# Altium PCB PCB1_DualModeCar.PcbDoc
Units mil, origin at the board's own origin, x right, y up, seen from the top; angles counter-clockwise.
Board outline 1775.03 x 3545.03 mil, 2 copper layers (Top Layer, Bottom Layer); 14 components, 14 nets, 67 pads, 43 vias.
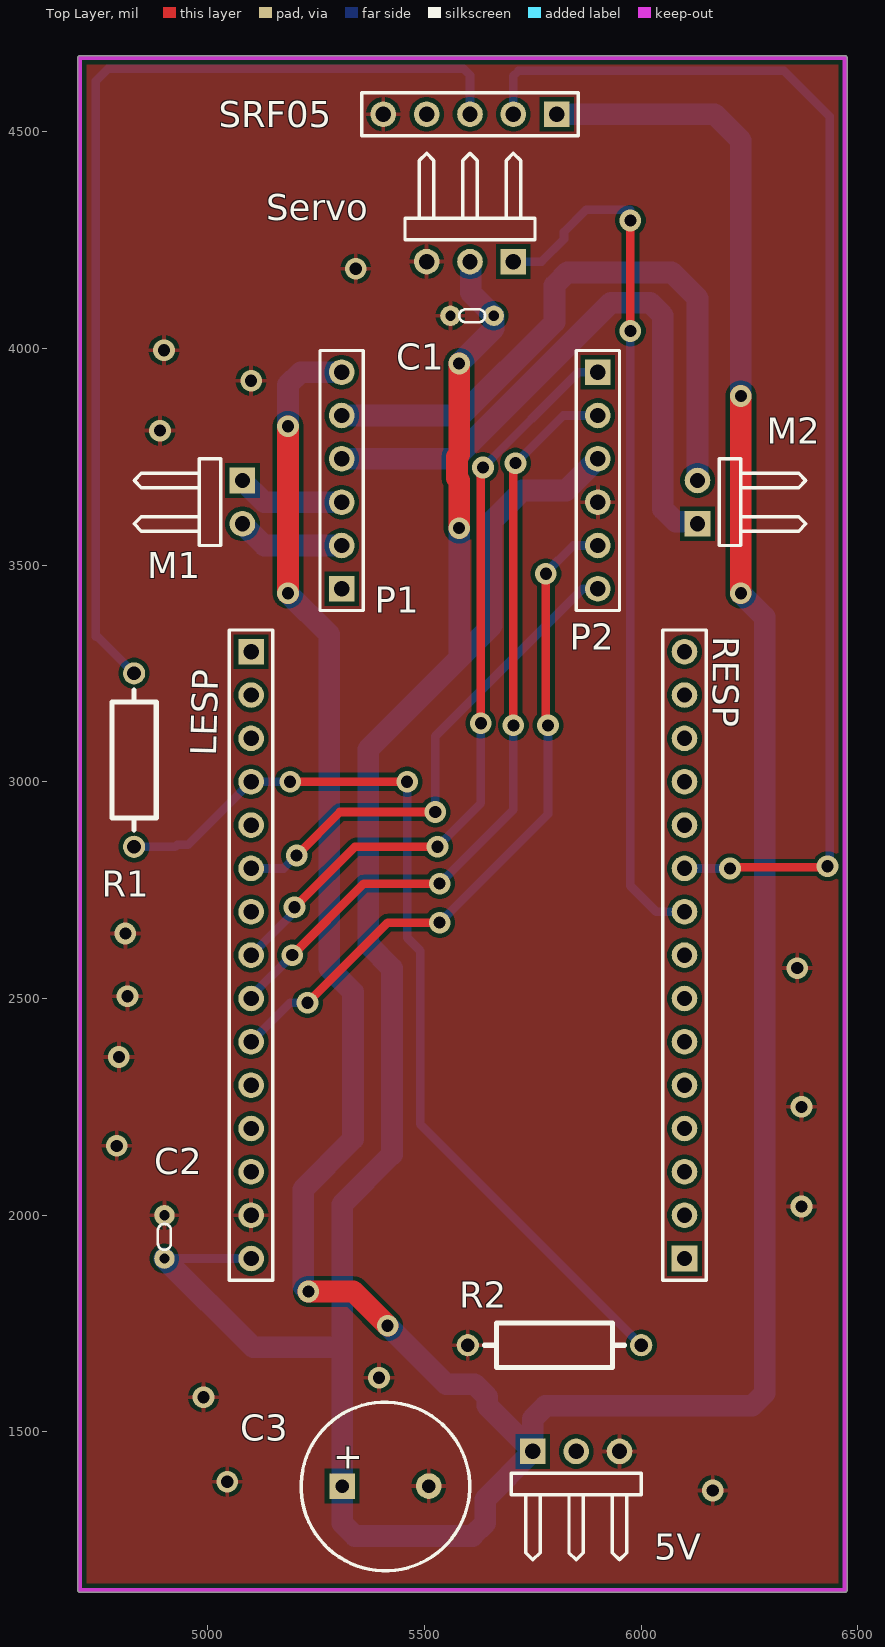
[diagram p0: Top Layer view]
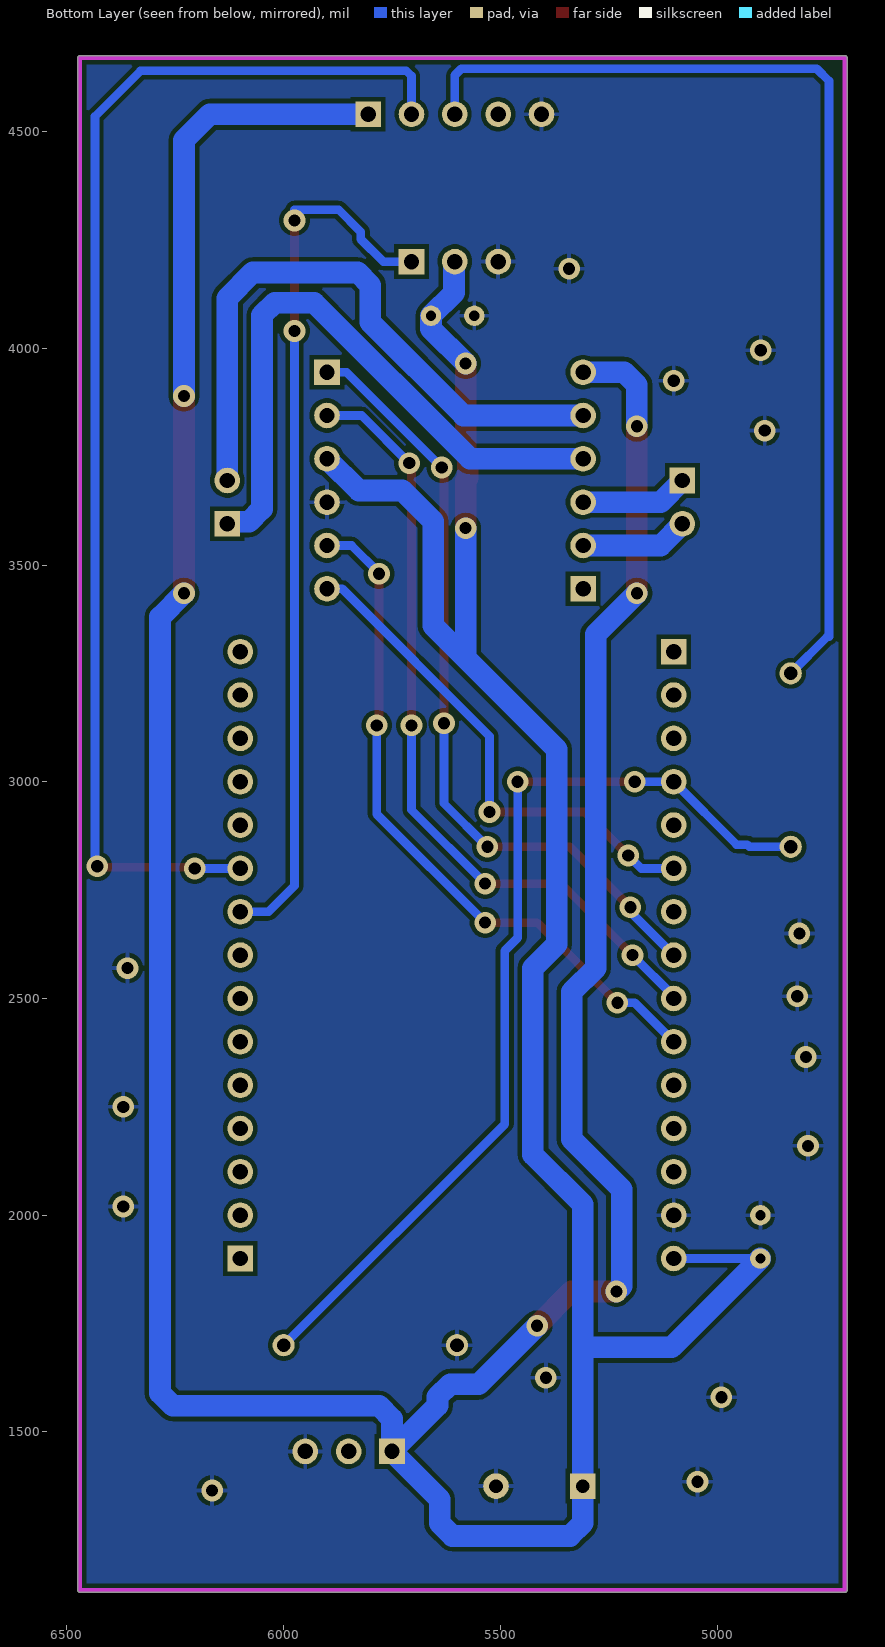
[diagram p1: Bottom Layer view, seen from below]
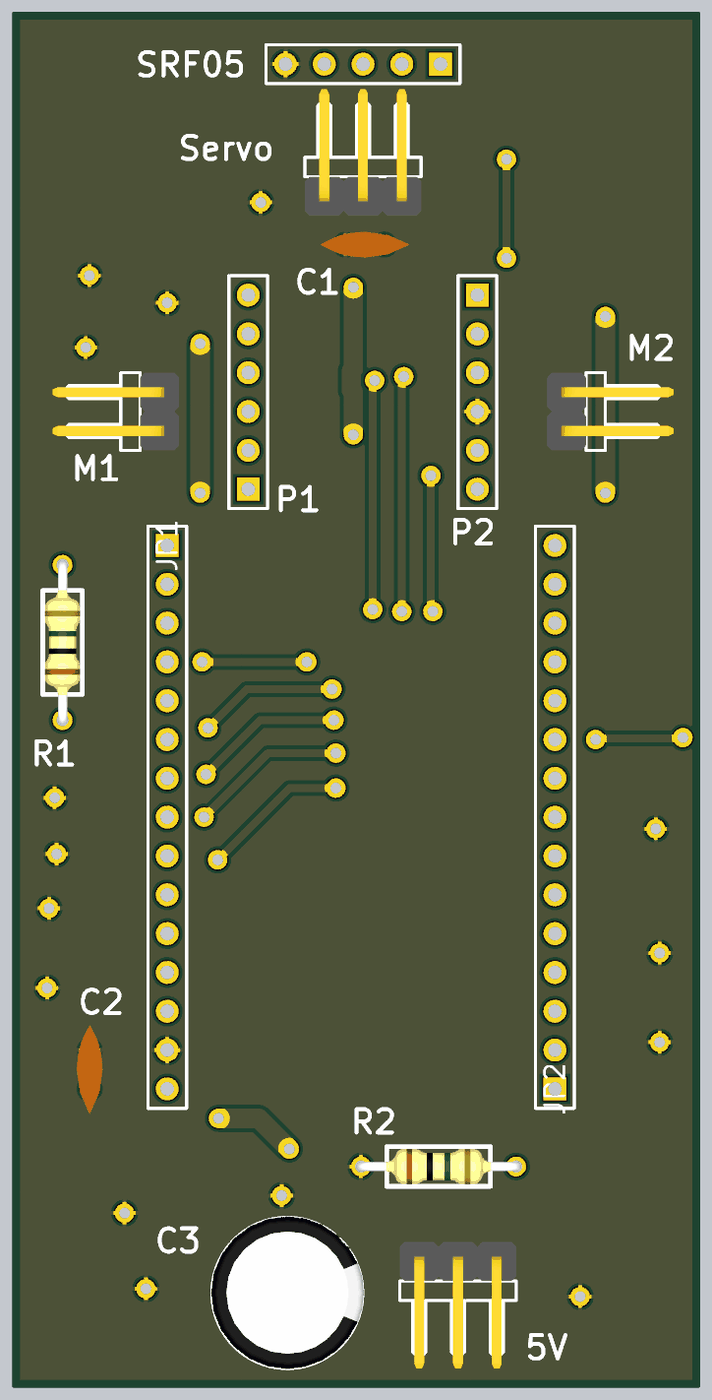
[diagram p2: 3D render of the assembled board from above, using the file's embedded part models]

## Layer stack, top to bottom
Top Solder: solder mask 0.4, Solder Resist, Dk 3.5
Top Layer: signal copper 1.4
Dielectric 1: dielectric 12.6, FR-4, Dk 4.8
Bottom Layer: signal copper 1.4
Bottom Solder: solder mask 0.4, Solder Resist, Dk 3.5

## Board outline
4699.98,1135 ccw(c4705,1135) 4705,1129.98 6470,1129.98 ccw(c6470,1135) 6475.02,1135 6475.02,4670 ccw(c6470,4670) 6470,4675.02 4705,4675.02 ccw(c4705,4670) 4699.98,4670

## Design rules (kind name [scope] priority, off if disabled: settings)
Clearance [All] p1: gap=10 ignorepadtopadclearanceinfootprint=FALSE
PolygonConnect [All] p1: connectstyle=Relief reliefconductorwidth=10 reliefentries=4 polygonreliefangle="90 Angle" airgapwidth=10
RoutingVias [All] p1: holewidth=28 width=50 viastyle="Through Hole" minholewidth=28 minwidth=50 maxholewidth=28 maxwidth=50
SolderMaskExpansion [All] p1: expansion=4 istentingtop=FALSE
Width [All] p1: maxlimit=50 minlimit=15 preferedwidth=20
30 further rules are at their usual default settings.

## Components (designator, comment, footprint, x,y, rotation, side; value= is the part's Value field where it differs from the comment)
5V "Header 3H" HDR1X3H 5750,1455 r0 top locked (schematic designator P7)
C1 "Capacitor Ceramic" Tu-pico 5660,4075 r180 top value=33p
C2 "Capacitor Ceramic" Tu-pico 4900,1900 r90 top locked value=33p
C3 "Cap Pol 8mm" C10mm 5410,1375 r0 top locked
LESP "Header 15" HDR1X15 5100,3300 r270 top locked (schematic designator JP1)
M1 "Header 2H" HDR1X2H 5080,3695 r270 top locked (schematic designator P5)
M2 "Header 2H" HDR1X2H 6130,3595 r90 top locked (schematic designator P6)
P1 "Header 6" HDR1X6 5309,3445 r90 top locked
P2 "Header 6" HDR1X6 5900,3945 r270 top locked
R1 "1k" "RES 1/4W CFR25" 4830,2850 r90 top value="R1/4W - 1K"
R2 "1k" "RES 1/4W CFR25" 5600,1700 r0 top locked value="R1/4W - 2K"
RESP "Header 15" HDR1X15 6100,1900 r90 top locked (schematic designator JP2)
Servo "Header 5" HDR1X5 5805,4540 r180 top (schematic designator P3)
SRF05 "Header 3H" HDR1X3H 5705,4200 r180 top (schematic designator P4)

## Footprints (in the part's own frame and the unit in brackets; to place one, negate y for a bottom-side part, rotate by r counter-clockwise, add the part's x,y. Pads: shape width x height; smd on the part's side, far side on the other; paste and mask are expansions set on the pad)
C10mm [mm]
  rect 1.5x1.5 hole 0.8: 1(-2.54,0)
  round 1.5 hole 0.8: 2(2.54,0)
  silkscreen extent -4.95,-4.96 4.93,4.92, body extent -5,-5 4.97,5, height 20.01
HDR1X2H [mm] "Connector; Header; 2 Position; Right Angle"
  rect 1.5x1.5 hole 0.9: 1(0,0)
  round 1.5 hole 0.9: 2(2.54,0)
  silkscreen extent -1.27,-6.35 3.81,-1.27, body extent -1.27,-7 3.81,1.27, height 4.33
HDR1X3H [mm] "Connector; Header; 3 Position; Right Angle"
  rect 1.5x1.5 hole 0.9: 1(0,0)
  round 1.5 hole 0.9: 2(2.54,0) 3(5.08,0)
  silkscreen extent -1.27,-6.35 6.35,-1.27, body extent -1.27,-7 6.35,1.27, height 4.33
HDR1X5 [mm] "Connector; Header; 5 Position"
  rect 1.5x1.5 hole 0.9: 1(0,0)
  round 1.5 hole 0.9: 2(2.54,0) 3(5.08,0) 4(7.62,0) 5(10.16,0)
  silkscreen extent -1.27,-1.27 11.43,1.27, body extent -1.27,-1.27 11.43,1.27, height 7
HDR1X6 [mm] "Connector; Header; 6 Position"
  rect 1.5x1.5 hole 0.9: 1(0,0)
  round 1.5 hole 0.9: 2(2.54,0) 3(5.08,0) 4(7.62,0) 5(10.16,0) 6(12.7,0)
  silkscreen extent -1.27,-1.27 13.97,1.27, body extent -1.27,-1.27 13.97,1.27, height 7
HDR1X15 [mm] "Connector; Header; 15 Position"
  rect 1.5x1.5 hole 0.9: 1(0,0)
  round 1.5 hole 0.9: 2(2.54,0) 3(5.08,0) 4(7.62,0) 5(10.16,0) 6(12.7,0) 7(15.24,0) 8(17.78,0) 9(20.32,0) 10(22.86,0) 11(25.4,0) 12(27.94,0) 13(30.48,0) 14(33.02,0) 15(35.56,0)
  silkscreen extent -1.27,-1.27 36.83,1.27, body extent -1.27,-1.27 36.83,1.27, height 7
"RES 1/4W CFR25" [mm] "Axial Device, Thru-Hole; 2 Leads fi 0.55"
  round 1.3 hole 0.8 mask+0.1: 1(0,0) 2(10.16,0)
  silkscreen extent 0.98,-1.3 9.18,1.3, body extent -0.3,-1.16 10.47,1.16, height 2.93
Tu-pico [mm] "Tu gom mini"
  round 1.2 hole 0.6: 1(0,0) 2(2.54,0)
  silkscreen extent 0.51,-0.38 2.03,0.38, body extent -1.65,-0.85 4.19,0.85, height 6.12

## Part data
5V SRF05: "Header, 3-Pin, Right Angle", LatestRevisionDate=17-Jul-2002, LatestRevisionNote="Re-released for DXP Platform.", Publisher="Altium Limited"
C1 C2: library part CapCeramic, "Capacitor", LatestRevisionDate=17-Jul-2002, LatestRevisionNote="Re-released for DXP Platform.", PackageReference=RAD-0.3, Published=8-Jun-2000, Publisher="Altium Limited"
C3: "Polarized Capacitor (Axial)", LatestRevisionDate=17-Jul-2002, LatestRevisionNote="Re-released for DXP Platform.", PackageReference=POLAR0.8, Published=8-Jun-2000, Publisher="Altium Limited"
LESP RESP: "Header, 15-Pin, Right Angle"
M1 M2: "Header, 2-Pin, Right Angle", LatestRevisionDate=17-Jul-2002, LatestRevisionNote="Re-released for DXP Platform.", Publisher="Altium Limited"
P1 P2: "Header, 6-Pin", LatestRevisionDate=17-Jul-2002, LatestRevisionNote="Re-released for DXP Platform.", Publisher="Altium Limited"
R1 R2: library part Res, "Resistor 1/4W"
Servo: "Header, 5-Pin", LatestRevisionDate=17-Jul-2002, LatestRevisionNote="Re-released for DXP Platform.", Publisher="Altium Limited"

## Via types
v1: diameter 50, hole 28, Top Layer to Bottom Layer, 43 vias

## Nets (pads, with @x,y where several pads share a name; then routed paths per layer and width w, separated by ;. In a path a pad name is that pad's centre, name@x,y a point inside that pad or via, vN(x,y) a via of type N, cw(c..) or ccw(c..) an arc to the next point about the centre after c; other vN are vias at no path point)
GND: 5V.3 C1.2 C2.2 C3.2 LESP.14 P2.4 R2.1 Servo.5 SRF05.3 | length 7.4
  Bottom Layer w50: C3.2 C3.2@5512.45,1375 ; P2.4@5897.55,3645 P2.4 ; 5V.3@5948.27,1456.73 5V.3
  other v1: 6165,1365 5045,1385 4990,1580 5395,1625 6370,2020 4790,2160 6370,2250 4795,2365 4815,2505 6360,2570 4810,2650 4890,3810 5100,3925 4899.21,3995.36 5341.35,4183.65
NetJP1_4: LESP.4 R1.1 R2.2 | length 2215.8
  Top Layer w20: v1(5190,3000) v1(5460,3000)
  Bottom Layer w20: R1.1 4925,2850 4930,2855 4955,2855 LESP.4 v1(5190,3000) ; v1(5460,3000) 5460,2640 5490,2610 5490,2210 R2.2
NetJP1_6: LESP.6 P2.6 | length 1169.7
  Top Layer w20: v1(5205,2830) 5305,2930 v1(5525,2930)
  Bottom Layer w20: LESP.6 5175,2800 v1(5205,2830) ; v1(5525,2930) 5525,3105 5865,3445 P2.6
NetJP1_8: LESP.8 P2.1 | length 1814.2
  Top Layer w20: v1(5200,2710.36) 5339.64,2850 v1(5530,2850) ; v1(5630,3135) 5630,3720 v1(5635,3725)
  Bottom Layer w20: LESP.8 5200,2700 v1(5200,2710.36) ; v1(5530,2850) 5630,2950 v1(5630,3135) ; v1(5635,3725) 5855,3945 P2.1
NetJP1_9: LESP.9 P2.2 | length 1825.7
  Top Layer w20: v1(5195,2600) 5360,2765 v1(5535,2765) ; v1(5705,3130) 5705,3730 v1(5710,3735)
  Bottom Layer w20: LESP.9 5100,2505 v1(5195,2600) ; v1(5535,2765) 5705,2935 v1(5705,3130) ; v1(5710,3735) 5820,3845 P2.2
NetJP1_10: LESP.10 P2.5 | length 1607.6
  Top Layer w20: v1(5230,2490) 5415,2675 v1(5535,2675) ; v1(5780,3480) 5780,3135 v1(5785,3130)
  Bottom Layer w20: LESP.10 5190,2490 v1(5230,2490) ; v1(5535,2675) 5785,2925 v1(5785,3130) ; v1(5780,3480) 5780,3481.88 5843.12,3545 P2.5
NetJP2_9: RESP.9 SRF05.1 | length 2039.3
  Top Layer w20: v1(5975,4040) v1(5975,4295)
  Bottom Layer w20: SRF05.1 5770,4200 5821.72,4251.72 5821.72,4268.28 5873.43,4320 5975,4320 v1(5975,4295) ; v1(5975,4040) 5975,2760 6035,2700 RESP.9
NetJP2_10: RESP.10 Servo.2 | length 2930.8
  Top Layer w20: v1(6205,2800) 6207.5,2802.5 6427.5,2802.5 v1(6430,2805)
  Bottom Layer w20: Servo.2 5705,4628.28 5716.72,4640 6330,4640 6435,4535 6435,2810 v1(6430,2805) ; RESP.10 v1(6205,2800)
NetP1_2: M1.2 P1.2 | length 249.7
  Bottom Layer w50: M1.2 5130,3545 P1.2
NetP1_3: M1.1 P1.3 | length 249.7
  Bottom Layer w50: M1.1 5130,3645 P1.3
NetP1_4: M2.1 P1.4 | length 1442.9
  Bottom Layer w50: P1.4 5569.85,3745 5929.85,4105 6020.71,4105 6050,4075.71 6050,3629.29 6079.76,3599.53 6125.47,3599.53 M2.1
NetP1_5: M2.2 P1.5 | length 1453.2
  Bottom Layer w50: P1.5 5585,3845 5800,4060 5800,4145.71 5829.29,4175 6070.71,4175 6130,4115.71 M2.2
NetP3_3: R1.2 Servo.3 | length 2376.4
  Bottom Layer w20: R1.2 4745,3335 4741.72,3335 4741.72,4616.72 4770,4645 5590,4645 5605,4630 Servo.3
VCC: 5V.1 C1.1 C2.1 C3.1 LESP.15 P1.6 P2.3 Servo.1 SRF05.2 | length 12063.9
  Top Layer w50: v1(5185,3435) v1(5185,3820) ; v1(5232.21,1824.05) 5335.95,1824.05 v1(5415,1745) ; v1(5580,3585) 5580,3695.15 5575,3700.15 5575,3749.85 5580,3754.85 v1(5580,3965) ; v1(6230,3435) v1(6230,3890)
  Bottom Layer w20: C2.1 LESP.15
  Bottom Layer w50: C2.1 5105,1695 5310,1695 ; v1(5185,3435) 5280,3340 5280,2570 5335,2515 5335,2175 5220,2060 5220,1836.25 v1(5232.21,1824.05) ; v1(5185,3820) 5185,3915.71 5214.29,3945 P1.6 ; v1(5415,1745) 5550,1610 5615.71,1610 5645,1580.71 5645,1560 5V.1 ; v1(5580,3585) 5580,3285 ; v1(5580,3965) 5660,4045 C1.1 5606.73,4128.27 5606.73,4198.27 SRF05.2 ; Servo.1 6170,4540 6230,4480 v1(6230,3890) ; P2.3 5826.99,3671.99 5726.28,3671.99 5655,3600.71 5655,3360 5580,3285 ; v1(6230,3435) 6285,3380 6285,1589.29 6255.71,1560 5779.29,1560 5750,1530.71 5V.1 ; 5310,1695 5310,2025 5425,2140 5425,2570 5370,2625 5370,3075 5580,3285 ; 5310,1695 C3.1 5310,1289.29 5339.29,1260 5610.71,1260 5640,1289.29 5640,1345 5V.1
pads on no net: 5V.2 LESP.1 LESP.2 LESP.3 LESP.5 LESP.7 LESP.11 LESP.12 LESP.13 P1.1 RESP.1 RESP.2 RESP.3 RESP.4 RESP.5 RESP.6 RESP.7 RESP.8 RESP.11 RESP.12 RESP.13 RESP.14 RESP.15 Servo.4

## Polygon pours and split planes (outlines as drawn)
GND on Bottom Layer "GND_L02_P000" (solid, pour order 0): 4705,1135 4705,4670 6470,4670 6470,1135
GND on Top Layer "GND_L01_P001" (solid, pour order 1): 4705,4670 4705,1135 6470,1135 6470,4670

## Keep-outs
Keep-Out Layer:
  lines w10: 4915,1135 6470,1135 6470,4670 4705,4670 4705,1135 4930,1135

## Text inside footprints (layer, text, board x,y; h text height)
C3: Top Overlay "+" at 5290,1415 h60
R1: Mechanical 1 "R?" at 4830,2853.15 h19.68 r90
R2: Mechanical 1 "R?" at 5603.15,1700 h19.68